# Altium PCB ResistorChipPackage.PcbDoc
Units mm, origin at the board's own origin, x right, y up, seen from the top; angles counter-clockwise.
Board outline 65 x 35 mm, 2 copper layers (Top Layer, Bottom Layer); 19 components, 17 nets, 72 pads, 8 vias.
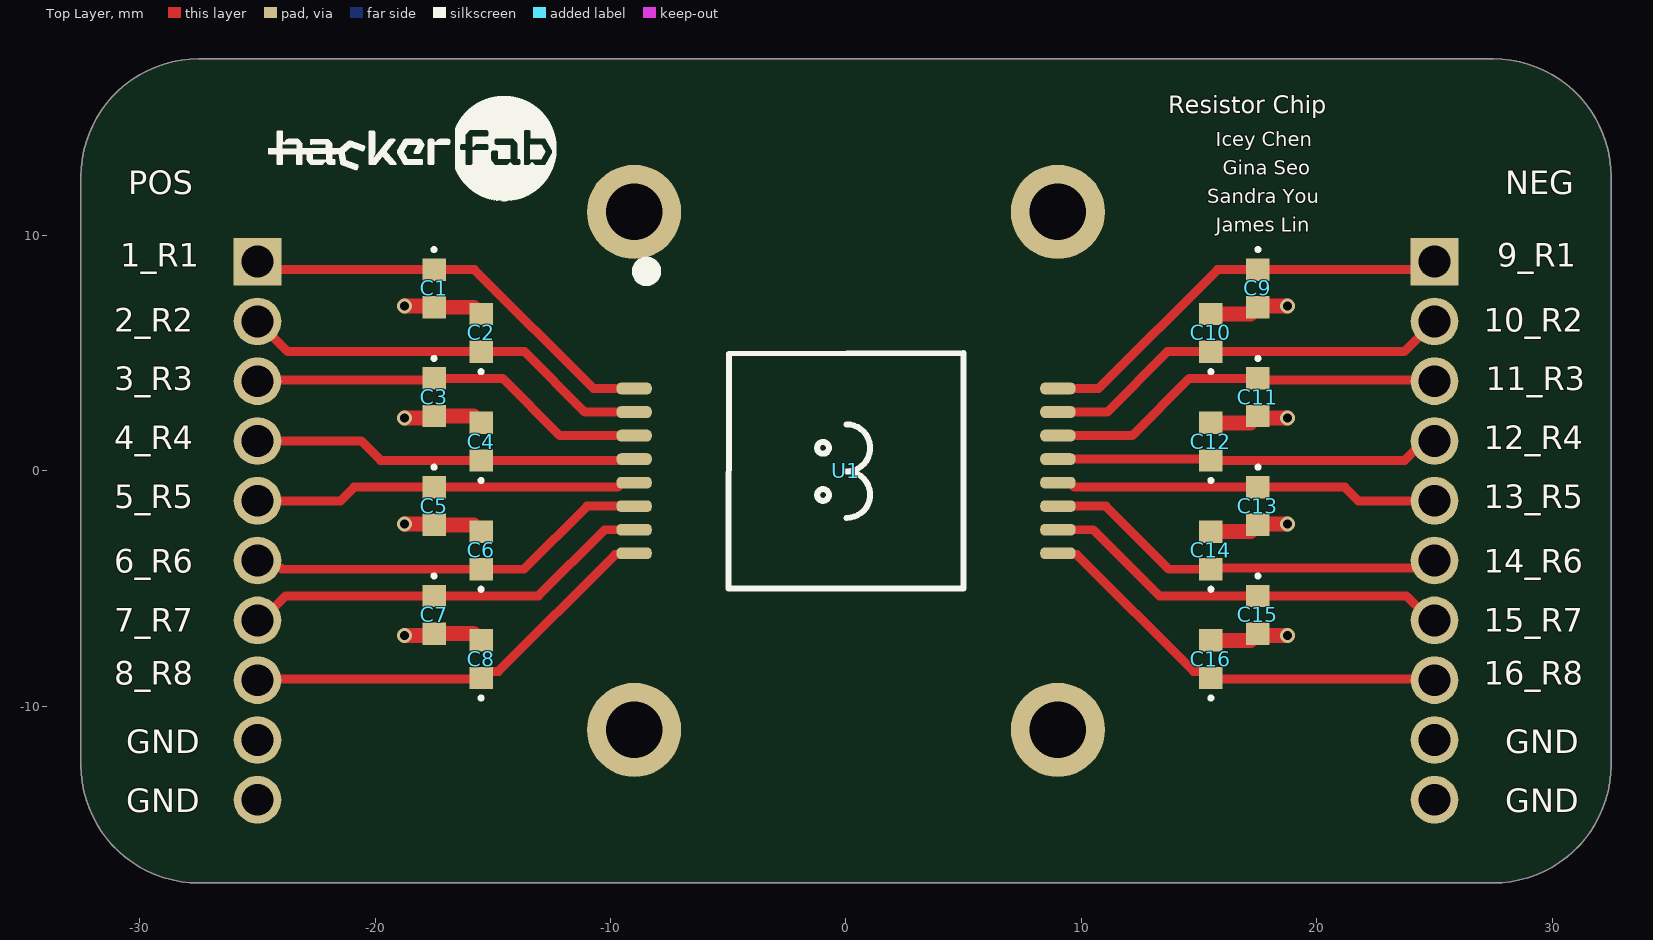
[diagram p0: Top Layer view]
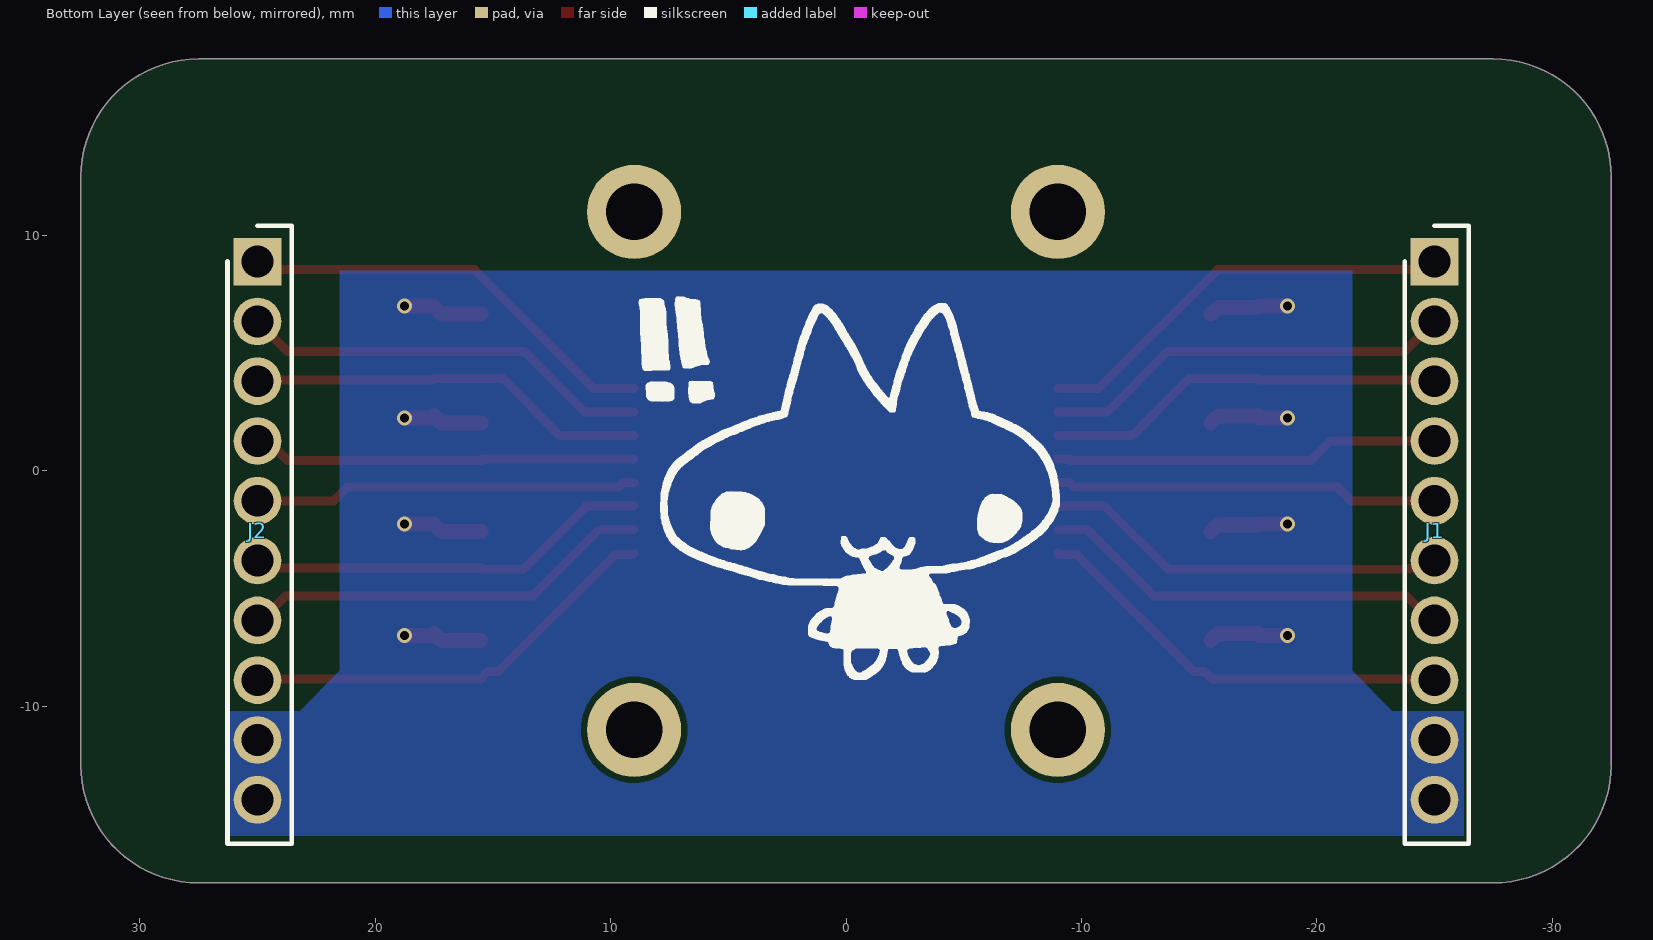
[diagram p1: Bottom Layer view, seen from below]

## Layer stack, top to bottom
Top Solder: solder mask 0.0102, Solder Resist, Dk 3.5
Top Layer: signal copper 0.0356
Dielectric 1: dielectric 0.32, FR-4, Dk 4.8
Bottom Layer: signal copper 0.0356
Bottom Solder: solder mask 0.0102, Solder Resist, Dk 3.5

## Board outline
-27.5,-17.5 cw(c-27.5,-12.5) -32.5,-12.5 -32.5,12.5 cw(c-27.5,12.5) -27.5,17.5 27.5,17.5 cw(c27.5,12.5) 32.5,12.5 32.5,-12.5 cw(c27.5,-12.5) 27.5,-17.5

## Design rules (kind name [scope] priority, off if disabled: settings)
Clearance [InNet('GND')] p1: gap=0.254 ignorepadtopadclearanceinfootprint=TRUE
PolygonConnect [All] p1: connectstyle=Direct reliefconductorwidth=0.254 reliefentries=4 polygonreliefangle="90 Angle" airgapwidth=0.254
RoutingVias [All] p1: holewidth=0.711 width=1.27 viastyle="Through Hole" minholewidth=0 minwidth=1.27 maxholewidth=15 maxwidth=15
SolderMaskExpansion [All] p1: expansion=0.102 istentingtop=FALSE
SupplyNets "Schematic Supply Nets" [InNet('GND')] p1: voltage=0.000
Width [All] p1: maxlimit=1 minlimit=0.254 preferedwidth=0.254 bottomlayer_maxwidth=0.254 minimp=50.000000 maximp=50.000000 favimp=50.000000
30 further rules are at their usual default settings.

## Components (designator, comment, footprint, x,y, rotation, side; value= is the part's Value field where it differs from the comment)
C1 "0.1 uF" C0603 -17.5,7.75 r270 top
C2 "0.1 uF" C0603 -15.5,5.863 r90 top
C3 "0.1 uF" C0603 -17.5,3.129 r270 top
C4 "0.1 uF" C0603 -15.5,1.242 r90 top
C5 "0.1 uF" C0603 -17.5,-1.492 r270 top
C6 "0.1 uF" C0603 -15.5,-3.379 r90 top
C7 "0.1 uF" C0603 -17.5,-6.113 r270 top
C8 "0.1 uF" C0603 -15.5,-8 r90 top
C9 "0.1 uF" C0603 17.5,7.75 r270 top
C10 "0.1 uF" C0603 15.5,5.863 r90 top
C11 "0.1 uF" C0603 17.5,3.129 r270 top
C12 "0.1 uF" C0603 15.5,1.242 r90 top
C13 "0.1 uF" C0603 17.5,-1.492 r270 top
C14 "0.1 uF" C0603 15.5,-3.379 r90 top
C15 "0.1 uF" C0603 17.5,-6.113 r270 top
C16 "0.1 uF" C0603 15.5,-8 r90 top
J1 "PPTC101LFBN-RC" RHDR10W80P0X254_1X10_2590X254X850P -25,8.89 r270 bottom locked
J2 "PPTC101LFBN-RC" RHDR10W80P0X254_1X10_2590X254X850P 25,8.89 r270 bottom locked
U1 "HF-RES" HF-COB 0.024,-0.024 r0 top locked

## Footprints (in the part's own frame and the unit in brackets; to place one, negate y for a bottom-side part, rotate by r counter-clockwise, add the part's x,y. Pads: shape width x height; smd on the part's side, far side on the other; paste and mask are expansions set on the pad)
C0603 [mm]
  rect 0.95x1 smd: 1(-0.8,0) 2(0.8,0)
  silkscreen extent -1.7,-0.05 -1.6,0.05, body extent -0.87,-0.48 0.88,0.47, height 0.95
HF-COB [mm] "Chip on board footprint"
  rrect80% 1.5x0.5 smd mask+0: 1(-9.024,3.524) 2(-9.024,2.524) 3(-9.024,1.524) 4(-9.024,0.524) 5(-9.024,-0.476) 6(-9.024,-1.476) 7(-9.024,-2.476) 8(-9.024,-3.476) 9(8.976,3.524) 10(8.976,2.524) 11(8.976,1.524) 12(8.976,0.524) 13(8.976,-0.476) 14(8.976,-1.476) 15(8.976,-2.476) 16(8.976,-3.476)
  silkscreen extent -8.75,-4.98 4.98,8.75, body extent -5,-5 5,5, height 0.53
RHDR10W80P0X254_1X10_2590X254X850P [mm]
  rect 2.025x2.025 hole 1.35: 1(0,0)
  round 2.025 hole 1.35: 2(2.54,0) 3(5.08,0) 4(7.62,0) 5(10.16,0) 6(12.7,0) 7(15.24,0) 8(17.78,0) 9(20.32,0) 10(22.86,0)
  silkscreen extent -1.52,-1.27 24.73,1.46, body extent -1.52,-1.27 24.38,1.27, height 8.5

## Part data
C1 C2 C3 C4 C5 C6 C7 C8 C9 C10 C11 C12 C13 C14 C15 C16: library part C0603C104K5RAC7411, "Capacitor", Manufacturer_Name=KEMET, Mouser Part Number=80-C0603C104K5R7411, Arrow Part Number=C0603C104K5RAC7411, Arrow Price/Stock=https://www.arrow.com/en/products/c0603c104k5rac7411/kemet-corporation?region=nac, Datasheet Link=https://content.kemet.com/datasheets/KEM_C1002_X7R_SMD.pdf, Height=0.87mm, Manufacturer_Part_Number=C0603C104K5RAC7411, Mouser Price/Stock=https://www.mouser.co.uk/ProductDetail/KEMET/C0603C104K5RAC7411?qs=JxH5GSBHSCRTO9iUpWbJFg%3D%3D
J1 J2: "Connector", Manufacturer_Name=Sullins, Datasheet Link=http://www.sullinscorp.com/drawings/78_P(N)PxCxxxLFBN-RC,_10492-H.pdf, Height=8.5mm, Manufacturer_Part_Number=PPTC101LFBN-RC
U1: "Resistor chip for packaging test"

## Free pads (board coordinates)
  round 4 hole 2.4: 2(-9,-11) 2(-9,11) 2(9,-11) 2(9,11)

## Via types
v1: diameter 0.635, hole 0.381, Top Layer to Bottom Layer, tented both sides, 8 vias

## Nets (pads, with @x,y where several pads share a name; then routed paths per layer and width w, separated by ;. In a path a pad name is that pad's centre, name@x,y a point inside that pad or via, vN(x,y) a via of type N, cw(c..) or ccw(c..) an arc to the next point about the centre after c; other vN are vias at no path point)
GND: C1.2 C2.2 C3.2 C4.2 C5.2 C6.2 C7.2 C8.2 C9.2 C10.2 C11.2 C12.2 C13.2 C14.2 C15.2 C16.2 J1.9 J1.10 J2.9 J2.10 | length 27.2
  Top Layer w0.635: v1(-18.75,-7) -17.587,-7 C7.2 -15.812,-6.913 -15.683,-7.042 -15.658,-7.042 C8.2 ; v1(-18.75,-2.25) -17.542,-2.25 C5.2 -15.812,-2.292 -15.683,-2.422 -15.658,-2.422 C6.2 ; v1(-18.75,2.25) -17.579,2.25 C3.2 -15.812,2.329 -15.683,2.199 -15.658,2.199 C4.2 ; v1(-18.75,7) -17.55,7 C1.2 -15.812,6.95 -15.525,6.663 C2.2 ; C16.2 17.188,-7.2 17.317,-7.07 17.343,-7.07 C15.2 17.587,-7 v1(18.75,-7) ; C14.2 17.188,-2.579 17.317,-2.449 17.343,-2.449 C13.2 17.542,-2.25 v1(18.75,-2.25) ; C12.2 17.188,2.042 17.317,2.172 17.343,2.172 C11.2 17.579,2.25 v1(18.75,2.25) ; C10.2 17.188,6.663 17.475,6.95 C9.2 17.55,7 v1(18.75,7)
R1_IN: C1.1 J1.1 U1.1 | length 18.2
  Top Layer w0.381: J1.1 -24.66,8.55 -15.783,8.55 -10.733,3.5 U1.1
R1_OUT: C9.1 J2.1 U1.9 | length 18.2
  Top Layer w0.381: U1.9 10.733,3.5 15.783,8.55 24.66,8.55 J2.1
R2_IN: C2.1 J1.2 U1.2 | length 17.6
  Top Layer w0.381: J1.2 -23.713,5.063 -13.656,5.063 -11.093,2.5 U1.2
R2_OUT: C10.1 J2.2 U1.10 | length 17.7
  Top Layer w0.381: U1.10 11.093,2.5 13.656,5.063 23.713,5.063 J2.2@25.044,6.394
R3_IN: C3.1 J1.3 U1.3 | length 16.9
  Top Layer w0.381: J1.3@-24.881,3.929 -24.821,3.87 -17.56,3.87 C3.1 -14.589,3.929 -12.16,1.5 U1.3
R3_OUT: C11.1 J2.3 U1.11 | length 17.1
  Top Layer w0.381: U1.11 12.16,1.5 14.589,3.929 C11.1 17.56,3.87 24.94,3.87 J2.3@25,3.929
R4_IN: C4.1 J1.4 U1.4 | length 16.4
  Top Layer w0.381: J1.4 -20.596,1.27 -19.768,0.442 -9.563,0.442 -9.505,0.5 U1.4
R4_OUT: C12.1 J2.4 U1.12 | length 16.4
  Top Layer w0.381: U1.12 15.442,0.5 C12.1 ; C12.1@15.471,0.442 23.727,0.442 24.555,1.27 J2.4@25.05,1.27
R5_IN: C5.1 J1.5 U1.5 | length 16.3
  Top Layer w0.381: J1.5 -21.471,-1.27 -20.893,-0.692 -9.697,-0.692 -9.505,-0.5 U1.5
R5_OUT: C13.1 J2.5 U1.13 | length 16.3
  Top Layer w0.381: U1.13 9.505,-0.5 9.697,-0.692 C13.1 21.192,-0.692 21.77,-1.27 J2.5
R6_IN: C6.1 J1.6 U1.6 | length 17.3
  Top Layer w0.381: J1.6 -24.685,-4.125 -24.009,-4.125 -23.955,-4.179 -13.679,-4.179 -11,-1.5 U1.6
R6_OUT: C14.1 J2.6 U1.14 | length 17.2
  Top Layer w0.381: U1.14 11.035,-1.5 13.714,-4.179 C14.1 ; C14.1@15.5,-4.125 24.685,-4.125 J2.6
R7_IN: C7.1 J1.7 U1.7 | length 17.6
  Top Layer w0.381: J1.7 -24.834,-6.35 -23.797,-5.313 C7.1 -13.063,-5.313 -10.25,-2.5 U1.7
R7_OUT: C15.1 J2.7 U1.15 | length 17.6
  Top Layer w0.381: U1.15 10.5,-2.5 13.313,-5.313 C15.1 23.797,-5.313 24.834,-6.35 J2.7
R8_IN: C8.1 J1.8 U1.8 | length 18.1
  Top Layer w0.381: J1.8@-24.91,-8.8 -24.865,-8.845 C8.1@-15.545,-8.845 ; C8.1 -15.216,-8.515 -14.765,-8.515 -9.804,-3.554 -9.054,-3.554 U1.8
R8_OUT: C16.1 J2.8 U1.16 | length 18.2
  Top Layer w0.381: U1.16 9.054,-3.554 9.667,-3.554 9.673,-3.56 9.81,-3.56 14.765,-8.515 15.216,-8.515 C16.1 ; C16.1@15.5,-8.845 24.955,-8.845 J2.8

## Polygon pours and split planes (outlines as drawn)
GND on Bottom Layer "GND_L02_P000" (solid, pour order 0): -21.5,8.5 21.5,8.5 21.5,-8.5 23.2,-10.2 26.275,-10.2 26.275,-15.5 -26.25,-15.5 -26.25,-10.2 -23.2,-10.2 -21.5,-8.5

## Keep-outs
Keep-Out Layer:
  the board outline again, w0.013

## Silkscreen, mask and mechanical layers (free items; w line width, h text height)
Top Overlay:
  drawing of 6 lines, arcs and shapes, not listed
  text "Resistor Chip" at 13.69,15.19 h0.75
  text "Icey Chen" at 15.702,13.78 h0.6
  text "Gina Seo" at 16.002,12.57 h0.6
  text "POS" at -30.496,11.754 h1
  text "NEG" at 28.004,11.754 h1
  text "Sandra You" at 15.352,11.36 h0.6
  text "James Lin" at 15.702,10.15 h0.6
  text "1_R1" at -30.829,8.671 h1
  text "9_R1" at 27.671,8.671 h1
  text "2_R2" at -31.079,5.921 h1
  text "10_R2" at 27.088,5.921 h1
  text "3_R3" at -31.079,3.421 h1
  text "11_R3" at 27.171,3.421 h1
  text "4_R4" at -31.079,0.921 h1
  text "12_R4" at 27.088,0.921 h1
  text "5_R5" at -31.079,-1.579 h1
  text "13_R5" at 27.088,-1.579 h1
  text "6_R6" at -31.079,-4.329 h1
  text "14_R6" at 27.088,-4.329 h1
  text "7_R7" at -31.079,-6.829 h1
  text "15_R7" at 27.088,-6.829 h1
  text "8_R8" at -31.079,-9.079 h1
  text "16_R8" at 27.088,-9.079 h1
  text "GND" at -30.579,-11.996 h1
  text "GND" at 28.004,-11.996 h1
  text "GND" at -30.579,-14.496 h1
  text "GND" at 28.004,-14.496 h1
Bottom Overlay:
  drawing of 7 lines, arcs and shapes, not listed